# Altium PCB A1_v31.PcbDoc (part 6 of 6)
Units mil, origin at the board's own origin, x right, y up, seen from the top; angles counter-clockwise.
Board outline 3937.01 x 3149.61 mil, 2 copper layers (Top Layer, Bottom Layer); 94 components, 93 nets, 325 pads, 43 vias.
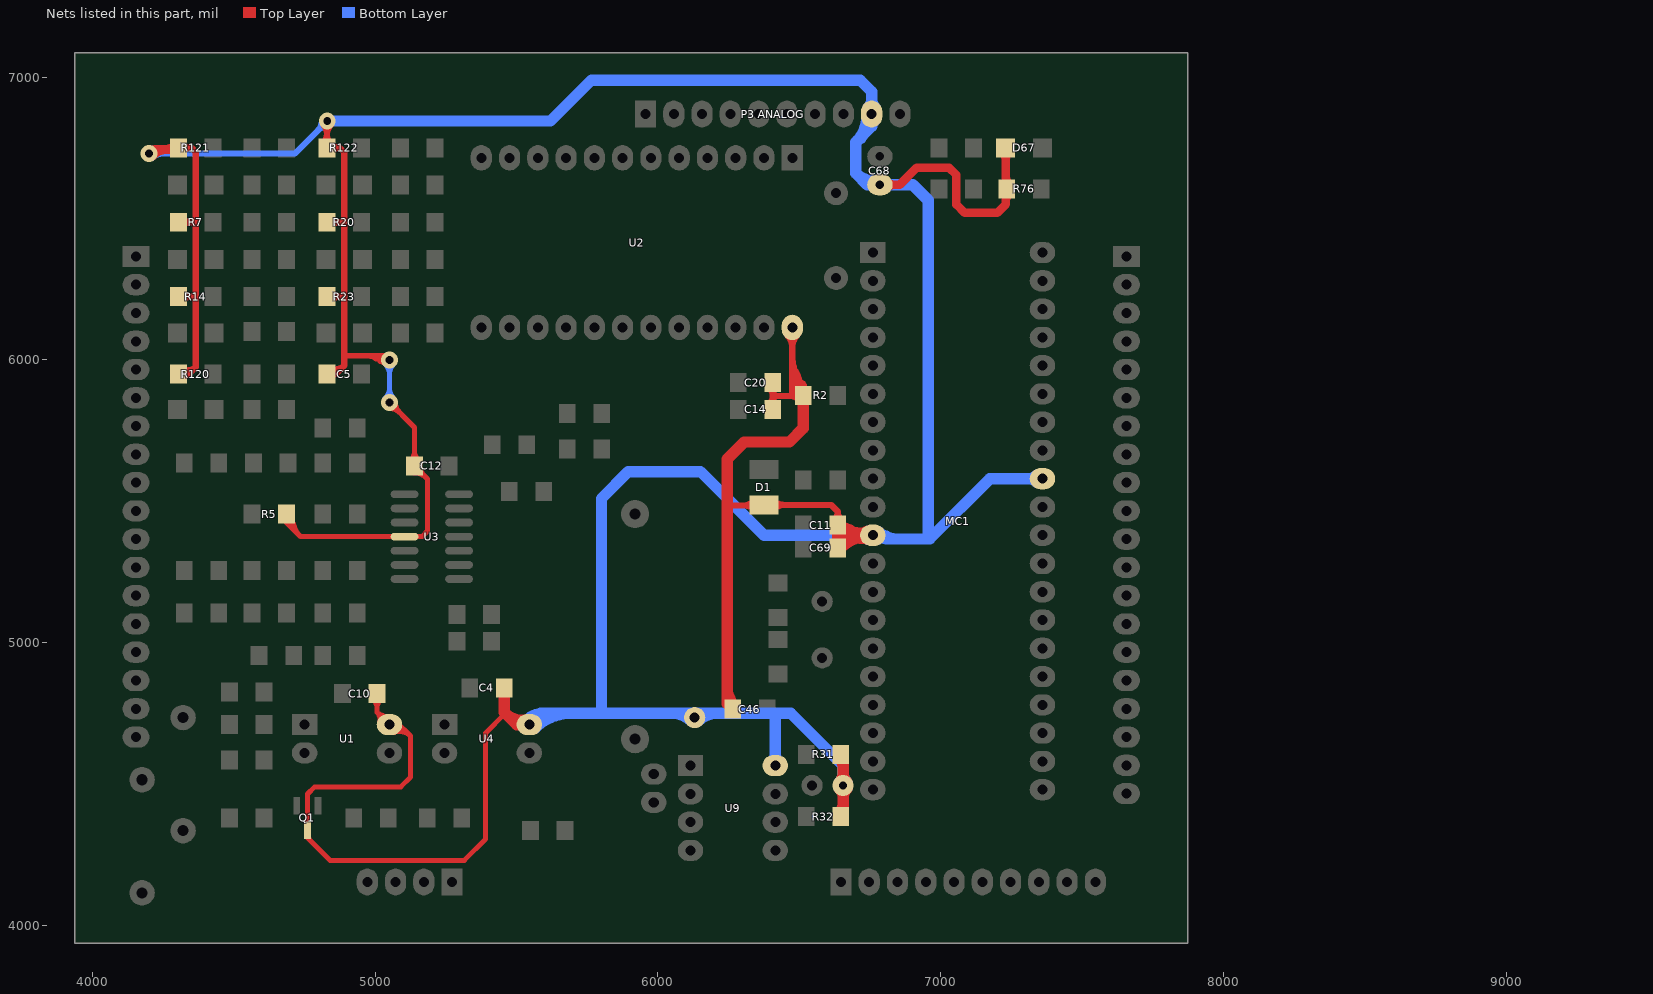
[diagram p6: the nets of this part, all layers, seen from the top]

## Via types
v1: diameter 60, hole 28, Top Layer to Bottom Layer, 30 vias
v2: diameter 90, hole 35.43, Top Layer to Bottom Layer, 6 vias
v3: diameter 75, hole 28, Top Layer to Bottom Layer, 5 vias
v4: diameter 75, hole 35.43, Top Layer to Bottom Layer, 2 vias

## Nets (pads, with @x,y where several pads share a name; then routed paths per layer and width w, separated by ;. In a path a pad name is that pad's centre, name@x,y a point inside that pad or via, vN(x,y) a via of type N, cw(c..) or ccw(c..) an arc to the next point about the centre after c; other vN are vias at no path point) (continued)
VCC: "P3 ANALOG.9" C4.2 C5.2 C10.2 C11.2 C12.2 C14.2 C20.2 C46.2 C68.1 C69.2 D1.1 D67.2 MC1.11 MC1.32 pad.0@6130,4735 Q1.3 R2.2 R5.1 R7.1 R14.1 R20.1 R23.1 R31.1 R32.1 R76.1 R120.2 R121.2 R122.2 U1.4 U2.24 U3.4 U4.4 U9.8 | length 36054.8
  Top Layer w18: R5.1@4686.02,5455 4686.02,5423.98 4735,5375 ; R5.1@4686.71,5430.55 cw(c4687.69,5400.93) 4709.83,5420.62 ; R5.1@4705.33,5444.08 ccw(c4727.27,5436.14) 4709.83,5420.63 ; 4890,6015 5035,6015 v1(5050,6000) ; C10.2@5006.02,4840 C10.2@5006.02,4820 5006.02,4753.98 U1.4@5050,4710 5085,4710 5125,4670 ; v1(5050,5850) 5138.98,5761.02 C12.2@5138.98,5625 5185,5578.98 5185,5395 5165,5375 U3.4@5103.54,5375 4735,5375 ; C4.2@5456.02,4840 5460,4836.02 5460,4750 5390,4680 5390,4305 5315,4230 4840,4230 4760,4310 Q1.3@4760,4336.69 4760,4464.57 4785.43,4490 5090,4490 5125,4525 5125,4670 ; R5.1@4680.13,5431.4 cw(c4673.48,5409.19) 4696.19,5413.87 ; R5.1@4680.13,5431.4 cw(c4673.48,5409.19) 4696.19,5413.87 ; R5.1@4680.13,5431.4 cw(c4673.48,5409.19) 4696.19,5413.87 ; R5.1@4684.63,5448.95 cw(c4644.07,5387.3) 4716.35,5402.21 ; R5.1@4684.63,5448.95 cw(c4644.07,5387.3) 4716.35,5402.21 ; R5.1@4684.63,5448.95 cw(c4644.07,5387.3) 4716.35,5402.21 ; R5.1@4688.55,5450.92 ccw(c4750.57,5447.29) 4706.64,5403.36 ; R5.1@4688.55,5450.92 ccw(c4750.57,5447.29) 4706.64,5403.36 ; R5.1@4688.55,5450.92 ccw(c4750.57,5447.29) 4706.64,5403.36 ; 4696.19,5413.87 cw(c4725.03,5419.82) R5.1@4702.05,5438.23 ; 4696.19,5413.87 cw(c4725.03,5419.82) R5.1@4702.05,5438.23 ; 4696.19,5413.87 cw(c4725.03,5419.82) R5.1@4702.05,5438.23 ; R5.1@4706.52,5449.87 ccw(c4804.16,5444.16) 4735,5375 ; R5.1@4706.52,5449.87 ccw(c4804.16,5444.16) 4735,5375 ; R5.1@4706.52,5449.87 ccw(c4804.16,5444.16) 4735,5375 ; Q1.3@4758.59,4314.57 cw(c4750.57,4300.67) 4766.08,4304.82 ; Q1.3@4758.59,4314.57 cw(c4750.57,4300.67) 4766.08,4304.82 ; Q1.3@4758.59,4314.57 cw(c4750.57,4300.67) 4766.08,4304.82 ; Q1.3@4762.81,4317.01 ccw(c4786.51,4317.01) 4769.75,4300.25 ; Q1.3@4762.81,4317.01 ccw(c4786.51,4317.01) 4769.75,4300.25 ; Q1.3@4762.81,4317.01 ccw(c4786.51,4317.01) 4769.75,4300.25 ; 4963.09,6015 cw(c4963.09,5913.09) v1@5035.15,5985.15 ; 4963.09,6015 cw(c4963.09,5913.09) v1@5035.15,5985.15 ; 4963.09,6015 cw(c4963.09,5913.09) v1@5035.15,5985.15 ; C10.2@4991.51,4801.55 cw(c4956.47,4766.51) 5006.02,4766.51 ; C10.2@4991.51,4801.55 cw(c4956.47,4766.51) 5006.02,4766.51 ; C10.2@4991.51,4801.55 cw(c4956.47,4766.51) 5006.02,4766.51 ; 4999.61,6005.67 ccw(c5012.51,6028.02) v1@5033.18,6012.57 ; 4999.61,6005.67 ccw(c5012.51,6028.02) v1@5033.18,6012.57 ; 4999.61,6005.67 ccw(c5012.51,6028.02) v1@5033.18,6012.57 ; 5006.02,4766.51 cw(c5055.58,4766.51) C10.2@5020.54,4801.55 ; 5006.02,4766.51 cw(c5055.58,4766.51) C10.2@5020.54,4801.55 ; 5006.02,4766.51 cw(c5055.58,4766.51) C10.2@5020.54,4801.55 ; 5006.03,4753.97 cw(c4980.38,4728.33) U1.4@5015.17,4718.07 ; 5006.03,4753.97 cw(c4980.38,4728.33) U1.4@5015.17,4718.07 ; 5006.03,4753.97 cw(c4980.38,4728.33) U1.4@5015.17,4718.07 ; 5006.54,6015 cw(c5006.54,5956.54) v1@5047.88,5997.88 ; 5006.54,6015 cw(c5006.54,5956.54) v1@5047.88,5997.88 ; 5006.54,6015 cw(c5006.54,5956.54) v1@5047.88,5997.88 ; 5006.65,4753.35 ccw(c5042.5,4789.2) U1.4@5042.5,4738.5 ; 5006.65,4753.35 ccw(c5042.5,4789.2) U1.4@5042.5,4738.5 ; 5006.65,4753.35 ccw(c5042.5,4789.2) U1.4@5042.5,4738.5 ; 5017.16,5995.54 ccw(c5028.86,6015.8) v1@5047.6,6001.8 ; 5017.16,5995.54 ccw(c5028.86,6015.8) v1@5047.6,6001.8 ; 5017.16,5995.54 ccw(c5028.86,6015.8) v1@5047.6,6001.8 ; 5021.55,4744.11 cw(c5011.56,4706.83) U1.4@5049.96,4710.76 ; 5021.55,4744.11 cw(c5011.56,4706.83) U1.4@5049.96,4710.76 ; 5021.55,4744.11 cw(c5011.56,4706.83) U1.4@5049.96,4710.76 ; v1@5049.4,5847.06 cw(c5041.55,5808.73) 5079.35,5818.85 ; v1@5049.4,5847.06 cw(c5041.55,5808.73) 5079.35,5818.85 ; v1@5049.4,5847.06 cw(c5041.55,5808.73) 5079.35,5818.85 ; v1@5050,5829 cw(c5050,5778.3) 5085.85,5814.15 ; v1@5050,5829 cw(c5050,5778.3) 5085.85,5814.15 ; v1@5050,5829 cw(c5050,5778.3) 5085.85,5814.15 ; v1@5052.94,5850.6 ccw(c5091.27,5858.45) 5081.15,5820.65 ; v1@5052.94,5850.6 ccw(c5091.27,5858.45) 5081.15,5820.65 ; v1@5052.94,5850.6 ccw(c5091.27,5858.45) 5081.15,5820.65 ; U1.4@5061,4700.1 cw(c5075.05,4660.41) 5104.82,4690.18 ; U1.4@5061,4700.1 cw(c5075.05,4660.41) 5104.82,4690.18 ; U1.4@5061,4700.1 cw(c5075.05,4660.41) 5104.82,4690.18 ; U1.4@5067.01,4683.13 cw(c5085.59,4630.6) 5125,4670 ; U1.4@5067.01,4683.13 cw(c5085.59,4630.6) 5125,4670 ; U1.4@5067.01,4683.13 cw(c5085.59,4630.6) 5125,4670 ; v1@5071,5850 ccw(c5121.7,5850) 5085.85,5814.15 ; v1@5071,5850 ccw(c5121.7,5850) 5085.85,5814.15 ; v1@5071,5850 ccw(c5121.7,5850) 5085.85,5814.15 ; C12.2@5124.46,5643.45 ccw(c5089.42,5678.49) 5138.98,5678.49 ; C12.2@5124.46,5643.45 ccw(c5089.42,5678.49) 5138.98,5678.49 ; C12.2@5124.46,5643.45 ccw(c5089.42,5678.49) 5138.98,5678.49 ; C12.2@5138.98,5600.54 cw(c5138.98,5541.47) 5180.74,5583.24 ; C12.2@5138.98,5600.54 cw(c5138.98,5541.47) 5180.74,5583.24 ; C12.2@5138.98,5600.54 cw(c5138.98,5541.47) 5180.74,5583.24 ; 5138.98,5678.49 ccw(c5188.53,5678.49) C12.2@5153.49,5643.45 ; 5138.98,5678.49 ccw(c5188.53,5678.49) C12.2@5153.49,5643.45 ; 5138.98,5678.49 ccw(c5188.53,5678.49) C12.2@5153.49,5643.45 ; C12.2@5141.41,5621.73 ccw(c5182.42,5632.89) 5171.42,5591.84 ; C12.2@5141.41,5621.73 ccw(c5182.42,5632.89) 5171.42,5591.84 ; C12.2@5141.41,5621.73 ccw(c5182.42,5632.89) 5171.42,5591.84 ; C12.2@5159.5,5621.06 ccw(c5199.56,5621.06) 5171.23,5592.74 ; C12.2@5159.5,5621.06 ccw(c5199.56,5621.06) 5171.23,5592.74 ; C12.2@5159.5,5621.06 ccw(c5199.56,5621.06) 5171.23,5592.74 ; C4.2@5441.51,4821.55 cw(c5396.87,4776.91) 5460,4776.91 ; C4.2@5441.51,4821.55 cw(c5396.87,4776.91) 5460,4776.91 ; C4.2@5441.51,4821.55 cw(c5396.87,4776.91) 5460,4776.91 ; 5460,4796.1 cw(c5495.98,4796.1) C4.2@5470.54,4821.55 ; 5460,4796.1 cw(c5495.98,4796.1) C4.2@5470.54,4821.55 ; 5460,4796.1 cw(c5495.98,4796.1) C4.2@5470.54,4821.55
  Top Layer w22: v1(4200,6730) 4220,6750 R121.2@4303.98,6750 4350,6750 4365,6735 4365,6485 ; R120.2@4303.98,5950 4340,5950 ; R14.1@4303.98,6224.43 4360.57,6224.43 4365,6220 ; R7.1@4303.98,6487.21 4362.79,6487.21 4365,6485 ; C5.2@4828.98,5950 4860,5950 ; R23.1@4828.98,6224.43 4885.57,6224.43 4890,6220 ; R20.1@4828.98,6487.21 4887.79,6487.21 4890,6485 ; v1(4830,6845) 4828.98,6843.98 R122.2@4828.98,6750 4875,6750 4890,6735 4890,6485 ; 6245,5485 6372.99,5485 D1.1@6375,5487.01 6612.99,5487.01 6636.02,5463.98 C11.2@6636.02,5416 ; C14.2@6406.02,5825 6406.02,5872.5 ; C20.2@6406.02,5920 6406.02,5872.5 ; U2.24@6475,6115 6475,5875 ; 6484.64,5916.54 cw(c6471.38,5893.58) R2.2@6496.45,5884.96 ; 6497.26,5914.34 ccw(c6549.95,5912.57) R2.2@6511.44,5876.57 ; C68.1@6815,6620 6820,6615 6835,6615 ; D67.2@7230.04,6750 7233.98,6746.06 R76.1@7233.98,6605 ; v1@4197.88,6732.12 cw(c4241.04,6688.96) 4241.04,6750 ; v1@4197.88,6732.12 cw(c4241.04,6688.96) 4241.04,6750 ; v1@4197.88,6732.12 cw(c4241.04,6688.96) 4241.04,6750 ; v1@4207.34,6747.53 ccw(c4215.77,6767.66) 4226.69,6748.76 ; v1@4207.34,6747.53 ccw(c4215.77,6767.66) 4226.69,6748.76 ; v1@4207.34,6747.53 ccw(c4215.77,6767.66) 4226.69,6748.76 ; v1@4212.2,6744.57 ccw(c4236.5,6773.6) 4255.43,6740.81 ; v1@4212.2,6744.57 ccw(c4236.5,6773.6) 4255.43,6740.81 ; v1@4212.2,6744.57 ccw(c4236.5,6773.6) 4255.43,6740.81 ; v1@4213.44,6716.56 cw(c4294.15,6635.85) R121.2@4294.15,6750 ; v1@4213.44,6716.56 cw(c4294.15,6635.85) R121.2@4294.15,6750 ; v1@4213.44,6716.56 cw(c4294.15,6635.85) R121.2@4294.15,6750 ; v1@4218.82,6732.63 cw(c4234.72,6734.85) 4226.69,6748.76 ; v1@4218.82,6732.63 cw(c4234.72,6734.85) 4226.69,6748.76 ; v1@4218.82,6732.63 cw(c4234.72,6734.85) 4226.69,6748.76 ; 4247.7,6737.55 cw(c4262.77,6681.31) R121.2@4294.03,6730.43 ; 4247.7,6737.55 cw(c4262.77,6681.31) R121.2@4294.03,6730.43 ; 4247.7,6737.55 cw(c4262.77,6681.31) R121.2@4294.03,6730.43 ; 4259.25,6750 cw(c4259.25,6705.27) R121.2@4290.88,6736.9 ; 4259.25,6750 ccw(c4259.25,6794.73) R121.2@4290.88,6763.1 ; 4259.25,6750 ccw(c4259.25,6794.73) R121.2@4290.88,6763.1 ; 4259.25,6750 cw(c4259.25,6705.27) R121.2@4290.88,6736.9 ; 4259.25,6750 ccw(c4259.25,6794.73) R121.2@4290.88,6763.1 ; 4259.25,6750 cw(c4259.25,6705.27) R121.2@4290.88,6736.9 ; 4273.92,6744.58 ccw(c4267.95,6766.86) R121.2@4287.93,6755.33 ; 4273.92,6744.58 ccw(c4267.95,6766.86) R121.2@4287.93,6755.33 ; 4273.92,6744.58 ccw(c4267.95,6766.86) R121.2@4287.93,6755.33 ; R120.2@4302.1,5951.02 ccw(c4320.99,5980.4) 4345.7,5955.7 ; R120.2@4302.1,5951.02 ccw(c4320.99,5980.4) 4345.7,5955.7 ; R120.2@4302.1,5951.02 ccw(c4320.99,5980.4) 4345.7,5955.7 ; R120.2@4314,5969.52 ccw(c4336.1,6003.9) 4365,5975 ; R120.2@4314,5969.52 ccw(c4336.1,6003.9) 4365,5975 ; R120.2@4314,5969.52 ccw(c4336.1,6003.9) 4365,5975 ; R14.1@4317.08,6211.33 cw(c4348.71,6179.7) 4348.71,6224.43 ; R14.1@4317.08,6211.33 cw(c4348.71,6179.7) 4348.71,6224.43 ; R14.1@4317.08,6211.33 cw(c4348.71,6179.7) 4348.71,6224.43 ; R14.1@4317.08,6237.53 ccw(c4348.71,6269.16) 4348.71,6224.43 ; R14.1@4317.08,6237.53 ccw(c4348.71,6269.16) 4348.71,6224.43 ; R14.1@4317.08,6237.53 ccw(c4348.71,6269.16) 4348.71,6224.43 ; R7.1@4317.08,6474.11 cw(c4348.71,6442.48) 4348.71,6487.21 ; R7.1@4317.08,6474.11 cw(c4348.71,6442.48) 4348.71,6487.21 ; R7.1@4317.08,6474.11 cw(c4348.71,6442.48) 4348.71,6487.21 ; R7.1@4317.08,6500.31 ccw(c4348.71,6531.94) 4348.71,6487.21 ; R7.1@4317.08,6500.31 ccw(c4348.71,6531.94) 4348.71,6487.21 ; R7.1@4317.08,6500.31 ccw(c4348.71,6531.94) 4348.71,6487.21 ; R121.2@4317.08,6736.9 cw(c4348.71,6705.27) 4348.71,6750 ; R121.2@4317.08,6736.9 cw(c4348.71,6705.27) 4348.71,6750 ; R121.2@4317.08,6736.9 cw(c4348.71,6705.27) 4348.71,6750 ; R121.2@4317.08,6763.1 ccw(c4348.71,6794.73) 4348.71,6750 ; R121.2@4317.08,6763.1 ccw(c4348.71,6794.73) 4348.71,6750 ; R121.2@4317.08,6763.1 ccw(c4348.71,6794.73) 4348.71,6750 ; R120.2@4319.05,5939.22 cw(c4340,5924.25) 4340,5950 ; R120.2@4319.05,5939.22 cw(c4340,5924.25) 4340,5950 ; R120.2@4319.05,5939.22 cw(c4340,5924.25) 4340,5950 ; R120.2@4319.05,5960.78 ccw(c4340,5975.75) 4340,5950 ; R120.2@4319.05,5960.78 ccw(c4340,5975.75) 4340,5950 ; R120.2@4319.05,5960.78 ccw(c4340,5975.75) 4340,5950 ; 4340,5950 4365,5975 ; 4365,5975 4365,6220 ; 4365,6220 4365,6485 ; R122.2@4815.88,6767.04 ccw(c4784.25,6798.67) 4828.98,6798.67 ; R122.2@4815.88,6767.04 ccw(c4784.25,6798.67) 4828.98,6798.67 ; R122.2@4815.88,6767.04 ccw(c4784.25,6798.67) 4828.98,6798.67 ; v1@4816.56,6831.56 cw(c4786.6,6801.6) 4828.98,6801.6 ; v1@4816.56,6831.56 cw(c4786.6,6801.6) 4828.98,6801.6 ; v1@4816.56,6831.56 cw(c4786.6,6801.6) 4828.98,6801.6 ; C5.2@4827.5,5950.79 ccw(c4842.65,5983.05) 4867.85,5957.85 ; C5.2@4827.5,5950.79 ccw(c4842.65,5983.05) 4867.85,5957.85 ; C5.2@4827.5,5950.79 ccw(c4842.65,5983.05) 4867.85,5957.85 ; 4828.98,6796.66 cw(c4878.34,6796.66) v1@4843.44,6831.56 ; 4828.98,6796.66 cw(c4878.34,6796.66) v1@4843.44,6831.56 ; 4828.98,6796.66 cw(c4878.34,6796.66) v1@4843.44,6831.56 ; 4828.98,6798.67 ccw(c4873.71,6798.67) R122.2@4842.08,6767.04 ; 4828.98,6798.67 ccw(c4873.71,6798.67) R122.2@4842.08,6767.04 ; 4828.98,6798.67 ccw(c4873.71,6798.67) R122.2@4842.08,6767.04 ; C5.2@4836.85,5970.71 ccw(c4856.81,6013.19) 4890,5980 ; C5.2@4836.85,5970.71 ccw(c4856.81,6013.19) 4890,5980 ; C5.2@4836.85,5970.71 ccw(c4856.81,6013.19) 4890,5980 ; R23.1@4842.08,6211.33 cw(c4873.71,6179.7) 4873.71,6224.43 ; R23.1@4842.08,6211.33 cw(c4873.71,6179.7) 4873.71,6224.43 ; R23.1@4842.08,6211.33 cw(c4873.71,6179.7) 4873.71,6224.43 ; R23.1@4842.08,6237.53 ccw(c4873.71,6269.16) 4873.71,6224.43 ; R23.1@4842.08,6237.53 ccw(c4873.71,6269.16) 4873.71,6224.43 ; R23.1@4842.08,6237.53 ccw(c4873.71,6269.16) 4873.71,6224.43 ; R20.1@4842.08,6474.11 cw(c4873.71,6442.48) 4873.71,6487.21 ; R20.1@4842.08,6474.11 cw(c4873.71,6442.48) 4873.71,6487.21 ; R20.1@4842.08,6474.11 cw(c4873.71,6442.48) 4873.71,6487.21 ; R20.1@4842.08,6500.31 ccw(c4873.71,6531.94) 4873.71,6487.21 ; R20.1@4842.08,6500.31 ccw(c4873.71,6531.94) 4873.71,6487.21 ; R20.1@4842.08,6500.31 ccw(c4873.71,6531.94) 4873.71,6487.21 ; R122.2@4842.08,6736.9 cw(c4873.71,6705.27) 4873.71,6750 ; R122.2@4842.08,6736.9 cw(c4873.71,6705.27) 4873.71,6750 ; R122.2@4842.08,6736.9 cw(c4873.71,6705.27) 4873.71,6750 ; R122.2@4842.08,6763.1 ccw(c4873.71,6794.73) 4873.71,6750 ; R122.2@4842.08,6763.1 ccw(c4873.71,6794.73) 4873.71,6750 ; R122.2@4842.08,6763.1 ccw(c4873.71,6794.73) 4873.71,6750 ; C5.2@4845.29,5941.21 cw(c4860,5933.29) 4860,5950 ; C5.2@4845.29,5941.21 cw(c4860,5933.29) 4860,5950 ; C5.2@4845.29,5941.21 cw(c4860,5933.29) 4860,5950 ; C5.2@4845.29,5958.79 ccw(c4860,5966.71) 4860,5950 ; C5.2@4845.29,5958.79 ccw(c4860,5966.71) 4860,5950 ; C5.2@4845.29,5958.79 ccw(c4860,5966.71) 4860,5950 ; 4860,5950 4890,5980 ; 4890,5980 4890,6015 4890,6220 ; 4890,6220 4890,6485 ; 6298.2,5485 ccw(c6298.2,5546.09) D1.1@6341.4,5502.89 ; 6298.2,5485 ccw(c6298.2,5546.09) D1.1@6341.4,5502.89 ; 6298.2,5485 ccw(c6298.2,5546.09) D1.1@6341.4,5502.89 ; 6307.9,5485 cw(c6307.9,5437.62) D1.1@6341.4,5471.12 ; 6307.9,5485 cw(c6307.9,5437.62) D1.1@6341.4,5471.12 ; 6307.9,5485 cw(c6307.9,5437.62) D1.1@6341.4,5471.12 ; C14.2@6393.17,5842.28 ccw(c6364.08,5872.5) 6406.02,5872.5 ; C14.2@6393.17,5842.28 ccw(c6364.08,5872.5) 6406.02,5872.5 ; C14.2@6393.17,5842.28 ccw(c6364.08,5872.5) 6406.02,5872.5 ; C20.2@6393.17,5902.72 cw(c6364.08,5872.5) 6406.02,5872.5 ; C20.2@6393.17,5902.72 cw(c6364.08,5872.5) 6406.02,5872.5 ; C20.2@6393.17,5902.72 cw(c6364.08,5872.5) 6406.02,5872.5 ; 6406.02,5872.5 cw(c6447.97,5872.5) C20.2@6418.87,5902.72 ; 6406.02,5872.5 ccw(c6447.97,5872.5) C14.2@6418.87,5842.28 ; 6406.02,5872.5 cw(c6447.97,5872.5) C20.2@6418.87,5902.72 ; 6406.02,5872.5 ccw(c6447.97,5872.5) C14.2@6418.87,5842.28 ; 6406.02,5872.5 cw(c6447.97,5872.5) C20.2@6418.87,5902.72 ; 6406.02,5872.5 ccw(c6447.97,5872.5) C14.2@6418.87,5842.28 ; 6406.02,5872.5 6511.48,5872.5 R2.2@6513.98,5875 6475,5875 ; D1.1@6408.6,5471.12 cw(c6446.95,5432.77) 6446.95,5487.01 ; D1.1@6408.6,5471.12 cw(c6446.95,5432.77) 6446.95,5487.01 ; D1.1@6408.6,5471.12 cw(c6446.95,5432.77) 6446.95,5487.01 ; D1.1@6408.6,5502.89 ccw(c6446.95,5541.24) 6446.95,5487.01 ; D1.1@6408.6,5502.89 ccw(c6446.95,5541.24) 6446.95,5487.01 ; D1.1@6408.6,5502.89 ccw(c6446.95,5541.24) 6446.95,5487.01 ; U2.24@6456.26,6088.76 cw(c6411.02,6043.52) 6475,6043.52 ; U2.24@6456.26,6088.76 cw(c6411.02,6043.52) 6475,6043.52 ; U2.24@6456.26,6088.76 cw(c6411.02,6043.52) 6475,6043.52 ; 6465.78,5872.5 cw(c6465.78,5822.86) R2.2@6500.88,5857.96 ; 6465.78,5872.5 cw(c6465.78,5822.86) R2.2@6500.88,5857.96 ; 6465.78,5872.5 cw(c6465.78,5822.86) R2.2@6500.88,5857.96 ; 6472.72,5872.5 ccw(c6472.72,5912.32) R2.2@6500.88,5884.16 ; 6472.72,5872.5 ccw(c6472.72,5912.32) R2.2@6500.88,5884.16 ; 6472.72,5872.5 ccw(c6472.72,5912.32) R2.2@6500.88,5884.16 ; 6475,5875 cw(c6475,5843.27) R2.2@6499.61,5863.3 ; 6475,5875 ccw(c6475,5906.73) R2.2@6499.61,5886.7 ; 6475,5875 ccw(c6475,5906.73) R2.2@6499.61,5886.7 ; 6475,5875 cw(c6475,5843.27) R2.2@6499.61,5863.3 ; 6475,5875 ccw(c6475,5906.73) R2.2@6499.61,5886.7 ; 6475,5875 cw(c6475,5843.27) R2.2@6499.61,5863.3 ; 6475,5911.54 ccw(c6546.58,5911.54) R2.2@6495.96,5860.93 ; 6475,5911.54 ccw(c6546.58,5911.54) R2.2@6495.96,5860.93 ; 6475,5911.54 ccw(c6546.58,5911.54) R2.2@6495.96,5860.93 ; 6475,5964.65 ccw(c6599.69,5964.65) R2.2@6511.52,5876.48 ; 6475,5964.65 ccw(c6599.69,5964.65) R2.2@6511.52,5876.48 ; 6475,5964.65 ccw(c6599.69,5964.65) R2.2@6511.52,5876.48 ; 6475,6017.76 ccw(c6652.8,6017.76) R2.2@6527.08,5892.04 ; 6475,6017.76 ccw(c6652.8,6017.76) R2.2@6527.08,5892.04 ; 6475,6017.76 ccw(c6652.8,6017.76) R2.2@6527.08,5892.04 ; 6475,6043.52 cw(c6538.98,6043.52) U2.24@6493.74,6088.76 ; 6475,6043.52 cw(c6538.98,6043.52) U2.24@6493.74,6088.76 ; 6475,6043.52 cw(c6538.98,6043.52) U2.24@6493.74,6088.76 ; 6481.73,5885.58 ccw(c6503.7,5898.27) R2.2@6515.61,5875.87 ; 6481.73,5885.58 ccw(c6503.7,5898.27) R2.2@6515.61,5875.87 ; 6481.73,5885.58 ccw(c6503.7,5898.27) R2.2@6515.61,5875.87 ; 6484.66,5923.01 ccw(c6533.31,5951.1) R2.2@6518.77,5896.83 ; 6484.66,5923.01 ccw(c6533.31,5951.1) R2.2@6518.77,5896.83 ; 6484.66,5923.01 ccw(c6533.31,5951.1) R2.2@6518.77,5896.83 ; 6487.21,5959.22 cw(c6406.85,5911.53) R2.2@6496.25,5884.33 ; 6487.21,5959.22 cw(c6406.85,5911.53) R2.2@6496.25,5884.33 ; 6487.21,5959.22 cw(c6406.85,5911.53) R2.2@6496.25,5884.33 ; 6492.76,5908.98 cw(c6463.94,5892.35) R2.2@6496.08,5883.73 ; 6492.76,5908.98 cw(c6463.94,5892.35) R2.2@6496.08,5883.73 ; 6492.76,5908.98 cw(c6463.94,5892.35) R2.2@6496.08,5883.73 ; 6512.66,5916.33 cw(c6471.45,5891.87) R2.2@6517.3,5877.93 ; 6512.66,5916.33 cw(c6471.45,5891.87) R2.2@6517.3,5877.93 ; 6512.66,5916.33 cw(c6471.45,5891.87) R2.2@6517.3,5877.93 ; C11.2@6623.07,5433.18 ccw(c6592.95,5463.97) 6636.02,5463.97 ; C11.2@6623.07,5433.18 ccw(c6592.95,5463.97) 6636.02,5463.97 ; C11.2@6623.07,5433.18 ccw(c6592.95,5463.97) 6636.02,5463.97 ; 6636.02,5463.97 ccw(c6679.09,5463.97) C11.2@6648.98,5433.18 ; 6636.02,5463.97 ccw(c6679.09,5463.97) C11.2@6648.98,5433.18 ; 6636.02,5463.97 ccw(c6679.09,5463.97) C11.2@6648.98,5433.18 ; C68.1@6804.23,6601.77 cw(c6835,6572.62) 6835,6615 ; C68.1@6804.23,6601.77 cw(c6835,6572.62) 6835,6615 ; C68.1@6804.23,6601.77 cw(c6835,6572.62) 6835,6615 ; C68.1@6808.9,6631.44 ccw(c6835,6643.93) 6835,6615 ; C68.1@6808.9,6631.44 ccw(c6835,6643.93) 6835,6615 ; C68.1@6808.9,6631.44 ccw(c6835,6643.93) 6835,6615 ; D67.2@7214.16,6734.12 cw(c7166.3,6686.26) 7233.98,6686.26 ; D67.2@7214.16,6734.12 cw(c7166.3,6686.26) 7233.98,6686.26 ; D67.2@7214.16,6734.12 cw(c7166.3,6686.26) 7233.98,6686.26 ; R76.1@7220.88,6622.04 ccw(c7189.25,6653.67) 7233.98,6653.67 ; R76.1@7220.88,6622.04 ccw(c7189.25,6653.67) 7233.98,6653.67 ; R76.1@7220.88,6622.04 ccw(c7189.25,6653.67) 7233.98,6653.67 ; 7233.98,6653.67 ccw(c7278.71,6653.67) R76.1@7247.08,6622.04 ; 7233.98,6653.67 ccw(c7278.71,6653.67) R76.1@7247.08,6622.04 ; 7233.98,6653.67 ccw(c7278.71,6653.67) R76.1@7247.08,6622.04 ; 7233.98,6705.27 cw(c7274.77,6705.27) D67.2@7245.92,6734.12 ; 7233.98,6705.27 cw(c7274.77,6705.27) D67.2@7245.92,6734.12 ; 7233.98,6705.27 cw(c7274.77,6705.27) D67.2@7245.92,6734.12
  Top Layer w30: C68.1@6815,6620 6855,6620 6915,6680 7030,6680 7055.5,6654.5 7055.5,6549.5 7085,6520 7200,6520 7230.04,6550.04 D67.2@7230.04,6750 ; C68.1@6800.91,6604.09 cw(c6839.32,6565.68) 6839.32,6620 ; C68.1@6800.91,6604.09 cw(c6839.32,6565.68) 6839.32,6620 ; C68.1@6800.91,6604.09 cw(c6839.32,6565.68) 6839.32,6620 ; C68.1@6800.91,6635.91 ccw(c6839.32,6674.32) 6839.32,6620 ; C68.1@6800.91,6635.91 ccw(c6839.32,6674.32) 6839.32,6620 ; C68.1@6800.91,6635.91 ccw(c6839.32,6674.32) 6839.32,6620 ; D67.2@7216.98,6736.94 cw(c7185.46,6705.42) 7230.04,6705.42 ; D67.2@7216.98,6736.94 cw(c7185.46,6705.42) 7230.04,6705.42 ; D67.2@7216.98,6736.94 cw(c7185.46,6705.42) 7230.04,6705.42 ; 7230.04,6556.49 cw(c7278.55,6556.49) R76.1@7244.25,6590.79 ; 7230.04,6556.49 cw(c7278.55,6556.49) R76.1@7244.25,6590.79 ; 7230.04,6556.49 cw(c7278.55,6556.49) R76.1@7244.25,6590.79 ; 7230.04,6653.51 ccw(c7278.55,6653.51) R76.1@7244.25,6619.21 ; 7230.04,6653.51 ccw(c7278.55,6653.51) R76.1@7244.25,6619.21 ; 7230.04,6653.51 ccw(c7278.55,6653.51) R76.1@7244.25,6619.21 ; 7230.04,6705.42 cw(c7274.62,6705.42) D67.2@7243.1,6736.94 ; 7230.04,6705.42 cw(c7274.62,6705.42) D67.2@7243.1,6736.94 ; 7230.04,6705.42 cw(c7274.62,6705.42) D67.2@7243.1,6736.94
  Top Layer w40: C4.2@5456.02,4840 5456.02,4753.98 5460,4750 ; U4.4@5534.21,4727.19 cw(c5518.63,4808.63) 5460,4750 ; U4.4@5545,4710 5500,4710 5460,4750 ; C46.2@6245,4783.98 6245,5485 6245,5650 6305,5710 6465,5710 6513.98,5758.98 R2.2@6513.98,5875 ; C69.2@6636.02,5335 C11.2@6636.02,5416 6672.02,5380 MC1.11@6760,5380 ; R32.1@6639.29,4395.67 ccw(c6601.35,4433.61) 6655,4433.61 ; R31.1@6639.29,4594.33 cw(c6601.35,4556.39) 6655,4556.39 ; v3@6642.63,4482.63 cw(c6612.75,4452.75) 6655,4452.75 cw(c6697.25,4452.75) v3@6667.37,4482.63 ; v3@6642.63,4507.37 ccw(c6612.75,4537.25) 6655,4537.25 ccw(c6697.25,4537.25) v3@6667.37,4507.37 ; C11.2@6644.5,5416.41 ccw(c6666.66,5427.75) 6666.66,5402.86 ; R32.1@6655,4391.02 v3(6655,4495) R31.1@6655,4610 ; 6245,4837.75 ccw(c6332.79,4837.75) C46.2@6270.71,4775.67 ; 6245,4837.75 ccw(c6332.79,4837.75) C46.2@6270.71,4775.67 ; 6245,4837.75 ccw(c6332.79,4837.75) C46.2@6270.71,4775.67 ; 6250.65,4810.43 cw(c6208.85,4786.29) C46.2@6254.89,4771.8 ; 6250.65,4810.43 cw(c6208.85,4786.29) C46.2@6254.89,4771.8 ; 6250.65,4810.43 cw(c6208.85,4786.29) C46.2@6254.89,4771.8 ; C11.2@6636.02,5402.54 cw(c6636.02,5370.03) C11.2@6659.01,5393.01 ; C11.2@6636.02,5402.54 cw(c6636.02,5370.03) C11.2@6659.01,5393.01 ; C11.2@6636.02,5402.54 cw(c6636.02,5370.03) C11.2@6659.01,5393.01 ; C11.2@6638.49,5402.86 cw(c6652.58,5350.29) 6679.79,5397.42 ; C11.2@6638.49,5402.86 cw(c6652.58,5350.29) 6679.79,5397.42 ; C11.2@6638.49,5402.86 cw(c6652.58,5350.29) 6679.79,5397.42 ; C69.2@6642.76,5332.2 cw(c6758.16,5216.8) MC1.11@6758.16,5380 ; C69.2@6642.76,5332.2 cw(c6758.16,5216.8) MC1.11@6758.16,5380 ; C69.2@6642.76,5332.2 cw(c6758.16,5216.8) MC1.11@6758.16,5380 ; C11.2@6642.76,5418.8 ccw(c6736.43,5512.47) MC1.11@6736.43,5380 ; C11.2@6642.76,5418.8 ccw(c6736.43,5512.47) MC1.11@6736.43,5380 ; C11.2@6642.76,5418.8 ccw(c6736.43,5512.47) MC1.11@6736.43,5380 ; 6700.92,5389.52 ccw(c6715.53,5444.04) MC1.11@6743.75,5395.16 ; 6700.92,5389.52 ccw(c6715.53,5444.04) MC1.11@6743.75,5395.16 ; 6700.92,5389.52 ccw(c6715.53,5444.04) MC1.11@6743.75,5395.16 ; 6710.25,5380 cw(c6710.25,5337.75) MC1.11@6740.13,5367.63 ; 6710.25,5380 ccw(c6710.25,5422.25) MC1.11@6740.13,5392.37 ; 6710.25,5380 ccw(c6710.25,5422.25) MC1.11@6740.13,5392.37 ; 6710.25,5380 cw(c6710.25,5337.75) MC1.11@6740.13,5367.63 ; 6710.25,5380 ccw(c6710.25,5422.25) MC1.11@6740.13,5392.37 ; 6710.25,5380 cw(c6710.25,5337.75) MC1.11@6740.13,5367.63 ; 6715.49,5368.57 cw(c6725.13,5332.59) MC1.11@6743.75,5364.84 ; 6715.49,5368.57 cw(c6725.13,5332.59) MC1.11@6743.75,5364.84 ; 6715.49,5368.57 cw(c6725.13,5332.59) MC1.11@6743.75,5364.84
  Bottom Layer w18: v1(5050,5850) v1(5050,6000) ; v1@5035.15,5864.85 ccw(c4999.3,5900.7) 5050,5900.7 ; v1@5035.15,5864.85 ccw(c4999.3,5900.7) 5050,5900.7 ; v1@5035.15,5864.85 ccw(c4999.3,5900.7) 5050,5900.7 ; v1@5035.15,5985.15 cw(c4999.3,5949.3) 5050,5949.3 ; v1@5035.15,5985.15 cw(c4999.3,5949.3) 5050,5949.3 ; v1@5035.15,5985.15 cw(c4999.3,5949.3) 5050,5949.3 ; 5050,5900.7 ccw(c5100.7,5900.7) v1@5064.85,5864.85 ; 5050,5900.7 ccw(c5100.7,5900.7) v1@5064.85,5864.85 ; 5050,5900.7 ccw(c5100.7,5900.7) v1@5064.85,5864.85 ; 5050,5949.3 cw(c5100.7,5949.3) v1@5064.85,5985.15 ; 5050,5949.3 cw(c5100.7,5949.3) v1@5064.85,5985.15 ; 5050,5949.3 cw(c5100.7,5949.3) v1@5064.85,5985.15
  Bottom Layer w22: v1(4200,6730) 4715,6730 v1(4830,6845) ; v1@4213.44,6716.56 cw(c4245.87,6684.13) 4245.87,6730 ; v1@4213.44,6716.56 cw(c4245.87,6684.13) 4245.87,6730 ; v1@4213.44,6716.56 cw(c4245.87,6684.13) 4245.87,6730 ; v1@4213.44,6743.44 ccw(c4245.87,6775.87) 4245.87,6730 ; v1@4213.44,6743.44 ccw(c4245.87,6775.87) 4245.87,6730 ; v1@4213.44,6743.44 ccw(c4245.87,6775.87) 4245.87,6730 ; 4797.56,6812.56 cw(c4830,6780.13) v1@4830,6826 ; 4797.56,6812.56 ccw(c4765.13,6845) v1@4811,6845 ; 4797.56,6812.56 ccw(c4765.13,6845) v1@4811,6845 ; 4797.56,6812.56 cw(c4830,6780.13) v1@4830,6826 ; 4797.56,6812.56 ccw(c4765.13,6845) v1@4811,6845 ; 4797.56,6812.56 cw(c4830,6780.13) v1@4830,6826
  Bottom Layer w40: v1(4830,6845) 5620,6845 5765,6990 6715,6990 6755.91,6949.09 6755.91,6870.08 6755.91,6825.91 6700,6770 6700,6660 ; U4.4@5536.59,4725.91 cw(c5594.75,4667.75) 5594.75,4750 ; U4.4@5545,4710 5585,4750 ; U4.4@5564.87,4697.63 cw(c5691.32,4571.18) 5691.32,4750 ; U4.4@5569.98,4710.9 cw(c5621.43,4713.57) 5585,4750 ; 6051.54,4750 cw(c6051.54,4656.54) pad.0@6117.63,4722.63 ; pad.0@6142.37,4722.63 cw(c6208.46,4656.54) 6208.46,4750 ; U9.8@6402.63,4577.37 ccw(c6372.75,4607.25) 6415,4607.25 ccw(c6457.25,4607.25) U9.8@6427.37,4577.37 ; U9.8@6415,4565 6415,4740 6405,4750 ; v3@6642.63,4507.37 ccw(c6612.75,4537.25) 6655,4537.25 ccw(c6697.25,4537.25) v3@6667.37,4507.37 ; v3(6655,4495) 6655,4565 6470,4750 6405,4750 ; 6728.07,6808.34 ccw(c6695.74,6840.66) 6739.25,6854.7 ; 6956,5387 6956,6565 6901,6620 C68.1@6785,6620 6740,6620 6700,6660 ; MC1.32@7360,5580 7174,5580 6961,5367 6811,5367 ; 5585,4750 5805,4750 ; 5805,4750 5800,4755 5800,5510 5895,5605 6150,5605 6375,5380 MC1.11@6760,5380 6798,5380 6811,5367 ; 5805,4750 6405,4750 ; 6700,6660 ccw(c6761.07,6721.06) C68.1@6780.97,6637.03 ; 6700,6660 ccw(c6761.07,6721.06) C68.1@6780.97,6637.03 ; 6700,6660 ccw(c6761.07,6721.06) C68.1@6780.97,6637.03 ; 6701.87,6771.87 ccw(c6613.66,6860.08) 6738.41,6860.08 ; 6701.87,6771.87 ccw(c6613.66,6860.08) 6738.41,6860.08 ; 6701.87,6771.87 ccw(c6613.66,6860.08) 6738.41,6860.08 ; 6710.25,5380 cw(c6710.25,5337.75) MC1.11@6740.13,5367.63 ; 6710.25,5380 ccw(c6710.25,5422.25) MC1.11@6740.13,5392.37 ; 6710.25,5380 ccw(c6710.25,5422.25) MC1.11@6740.13,5392.37 ; 6710.25,5380 cw(c6710.25,5337.75) MC1.11@6740.13,5367.63 ; 6710.25,5380 ccw(c6710.25,5422.25) MC1.11@6740.13,5392.37 ; 6710.25,5380 cw(c6710.25,5337.75) MC1.11@6740.13,5367.63 ; 6718.08,6784.23 cw(c6814.64,6758.35) 6764.66,6844.92 ; 6718.08,6784.23 cw(c6814.64,6758.35) 6764.66,6844.92 ; 6718.08,6784.23 cw(c6814.64,6758.35) 6764.66,6844.92 ; C68.1@6742.75,6620 cw(c6742.75,6577.75) C68.1@6772.63,6607.63 ; C68.1@6742.75,6620 ccw(c6742.75,6662.25) C68.1@6772.63,6632.37 ; C68.1@6742.75,6620 ccw(c6742.75,6662.25) C68.1@6772.63,6632.37 ; C68.1@6742.75,6620 cw(c6742.75,6577.75) C68.1@6772.63,6607.63 ; C68.1@6742.75,6620 ccw(c6742.75,6662.25) C68.1@6772.63,6632.37 ; C68.1@6742.75,6620 cw(c6742.75,6577.75) C68.1@6772.63,6607.63 ; 6743.53,6892.45 ccw(c6713.66,6922.33) 6755.91,6922.33 ; 6743.53,6892.45 ccw(c6713.66,6922.33) 6755.91,6922.33 ; 6743.53,6892.45 ccw(c6713.66,6922.33) 6755.91,6922.33 ; 6755.91,6922.33 ccw(c6798.15,6922.33) 6768.28,6892.45 ; 6755.91,6922.33 ccw(c6798.15,6922.33) 6768.28,6892.45 ; 6755.91,6922.33 ccw(c6798.15,6922.33) 6768.28,6892.45 ; MC1.11@6779.59,5367.35 cw(c6795.12,5351.12) 6811,5367 ; MC1.11@6779.59,5367.35 cw(c6795.12,5351.12) 6811,5367 ; MC1.11@6779.59,5367.35 cw(c6795.12,5351.12) 6811,5367 ; MC1.11@6779.87,5392.37 ccw(c6841.13,5453.63) 6841.13,5367 ; MC1.11@6779.87,5392.37 ccw(c6841.13,5453.63) 6841.13,5367 ; MC1.11@6779.87,5392.37 ccw(c6841.13,5453.63) 6841.13,5367 ; MC1.11@6781.28,5369.21 cw(c6799,5355.34) 6810.26,5374.83 ; MC1.11@6781.28,5369.21 cw(c6799,5355.34) 6810.26,5374.83 ; MC1.11@6781.28,5369.21 cw(c6799,5355.34) 6810.26,5374.83 ; MC1.11@6783.95,5385.96 ccw(c6811,5395.77) 6811,5367 ; MC1.11@6783.95,5385.96 ccw(c6811,5395.77) 6811,5367 ; MC1.11@6783.95,5385.96 ccw(c6811,5395.77) 6811,5367 ; C68.1@6797.37,6607.63 cw(c6827.25,6577.75) C68.1@6827.25,6620 ; C68.1@6797.37,6607.63 cw(c6827.25,6577.75) C68.1@6827.25,6620 ; C68.1@6797.37,6607.63 cw(c6827.25,6577.75) C68.1@6827.25,6620 ; C68.1@6797.37,6632.37 ccw(c6827.25,6662.25) C68.1@6827.25,6620 ; C68.1@6797.37,6632.37 ccw(c6827.25,6662.25) C68.1@6827.25,6620 ; C68.1@6797.37,6632.37 ccw(c6827.25,6662.25) C68.1@6827.25,6620 ; 7310.25,5580 cw(c7310.25,5537.75) MC1.32@7340.13,5567.63 ; 7310.25,5580 ccw(c7310.25,5622.25) MC1.32@7340.13,5592.37 ; 7310.25,5580 ccw(c7310.25,5622.25) MC1.32@7340.13,5592.37 ; 7310.25,5580 cw(c7310.25,5537.75) MC1.32@7340.13,5567.63 ; 7310.25,5580 ccw(c7310.25,5622.25) MC1.32@7340.13,5592.37 ; 7310.25,5580 cw(c7310.25,5537.75) MC1.32@7340.13,5567.63
pads on no net: "P2 RELAYS.9" "P2 RELAYS.10" "P3 ANALOG.8" P1PANEL.14 P1PANEL.15 P1PANEL.16 P1PANEL.17 P1PANEL.18 P4KB.13 P4KB.17 P4KB.18 P4KB.19 P4KB.20 PSTR1.2 PSTR1.3 PSTR1.4 U3.12 U3.13 U3.14 U9.7
copper on no net: | length 28346.5
  Top Layer w8: 3937.01,3937.01 7874.02,3937.01 7874.02,7086.61 3937.01,7086.61 3937.01,3937.01
  Bottom Layer w8: 3937.01,3937.01 7874.02,3937.01 7874.02,7086.61 3937.01,7086.61 3937.01,3937.01

## Polygon pours and split planes (outlines as drawn)
NetR8_2 on Bottom Layer "Top Layer-No Net 1" (solid, pour order 113): 5015,5030 5015,5175 5020,5180 5035,5165 5070,5165 5070,5025
GND on Bottom Layer "Top Layer-No Net 1" (solid, pour order 108): 46 vertices, not listed, extent 5385,4135 6335,4655
VCC on Bottom Layer "Top Layer-No Net 1" (solid, pour order 103): 36 vertices, not listed, extent 5505,4500 6690,5015
FLDIRIN on Bottom Layer "Top Layer-No Net" (solid, pour order 137): 4155,5930 4278,5930 4331,5983 4436,6088 4436,6091 4436,6096 4433,6099 4418,6099 4321,6002 4319,6000 4155,6000
CONT_S_IN on Bottom Layer "Top Layer-No Net" (solid, pour order 136): 4221,5676 4195,5702 4156,5702 4156,5630 4195,5630 4223,5658
GND on Bottom Layer "Top Layer-No Net" (solid, pour order 89): 28 vertices, not listed, extent 6750,5695 7235,6915
GND on Bottom Layer "Top Layer-No Net" (solid, pour order 94): 7360,5515 7195,5515 7130,5450 6995,5315 6760,5315 6760,5245 7185,5245 7270,5330 7285,5345 7285,5400 7285,5420 7305,5440 7310,5445 7360,5445
VCC on Bottom Layer "Top Layer-No Net" (solid, pour order 95): 45 vertices, not listed, extent 6665,5335 7360,6870
VCC on Bottom Layer "Top Layer-No Net" (solid, pour order 97): 32 vertices, not listed, extent 4070,6630 6790,7035
GND on Bottom Layer "Top Layer-No Net" (solid, pour order 99): 58 vertices, not listed, extent 5850,4695 6760,5310
GND on Bottom Layer "Top Layer-No Net" (solid, pour order 100): 22 vertices, not listed, extent 5850,5180 6770,5515
GND on Bottom Layer "Top Layer-No Net" (solid, pour order 102): 18 vertices, not listed, extent 4100,4100 5670,4460
GND on Bottom Layer "Top Layer-No Net" (solid, pour order 104): 46 vertices, not listed, extent 4310,4385 5455,5235
GND on Bottom Layer "Top Layer-No Net" (solid, pour order 105): 5380,4605 5380,4750 5510,4880 5620,4990 5620,5025 5580,5065 5550,5065 5495,5010 5320,4835 5320,4640
GND on Bottom Layer "Top Layer-No Net" (solid, pour order 106): 5380,4525 5380,4680 5370,4690 5320,4640 5320,4595 5320,4525 5325,4520
GND on Bottom Layer "Top Layer-No Net" (solid, pour order 107): 23 vertices, not listed, extent 4820,4535 5395,4895
GND on Bottom Layer "Top Layer-No Net" (solid, pour order 109): 36 vertices, not listed, extent 4940,4530 5345,4830
GND on Bottom Layer "Top Layer-No Net" (solid, pour order 110): 4800,4645 4810,4645 4830,4665 4870,4625 4870,4595 4800,4595 4795,4590
GND on Bottom Layer "Top Layer-No Net" (solid, pour order 111): 23 vertices, not listed, extent 4570,4625 4920,4910
GND on Bottom Layer "Top Layer-No Net" (solid, pour order 112): 4685,4645 4645,4685 4645,4590 4690,4590 4695,4595
GND on Bottom Layer "Top Layer-No Net" (solid, pour order 114): 35 vertices, not listed, extent 4495,4800 5515,5235
GND on Bottom Layer "Top Layer-No Net" (solid, pour order 115): 4985,5175 4985,5190 5005,5210 5010,5215 5060,5215 5090,5215 5105,5200 5125,5220 5145,5220 5130,5235 4905,5235 4905,5185 4910,5180 4925,5165 4985,5165
VCC on Bottom Layer "Top Layer-No Net" (solid, pour order 116): 5025,5800 5125,5800 5155,5830 5155,6025 5135,6045 5125,6055 5015,6055 4990,6030 4990,5985 4990,5835 5025,5800
GND on Bottom Layer "Top Layer-No Net" (solid, pour order 117): 34 vertices, not listed, extent 4230,5315 5770,6720
GND on Bottom Layer "Top Layer-No Net" (solid, pour order 119): 6800,5245 6820,5245 6850,5215 6850,5060 6890,5020 6895,5015 7075,5015 7255,5015 7280,5040 7285,5045 7285,5345
GND on Bottom Layer "Top Layer-No Net" (solid, pour order 120): 7285,5275 7285,5410 7270,5425 7145,5300 7145,5280 7260,5280 7265,5275
ANALOGIN on Bottom Layer "Top Layer-No Net" (solid, pour order 122): 6765,6245 6550,6245 6510,6285 6440,6355 6440,6710 6510,6710 6510,6385 6560,6335 6565,6330 6670,6330 6675,6330 6690,6315 6765,6315
GND on Bottom Layer "Top Layer-No Net" (solid, pour order 123): 35 vertices, not listed, extent 5895,5820 6675,6625
GND on Bottom Layer "Top Layer-No Net" (solid, pour order 125): 5685.52,6380.85 5691.37,6375 5740,6375 5755,6390 5755,6435 5755,6555 5750,6560 5685,6625 5615,6625 5205,6625 5175,6595 5335,6435 5510,6435 5631.37,6435 5685.52,6380.85
GND on Bottom Layer "Top Layer-No Net" (solid, pour order 126): 7235,6410 7320,6495 7580,6495 7590,6495 7700,6605 7700,6855 7640,6915 7035,6915 7035,6790 6955,6710 7135,6530 7135,6385
R1IN on Bottom Layer "Top Layer-No Net" (solid, pour order 139): 23 vertices, not listed, extent 4015,4465 4250,5300
TIOUT on Bottom Layer "Top Layer-No Net" (solid, pour order 140): 17 vertices, not listed, extent 4150,4725 4365,5200
DG-Y_ on Bottom Layer "Top Layer-No Net" (solid, pour order 165): 5974,6771 5952,6749 5952,6727 5983,6727 5990,6734 6006,6750 6006,6771
EB-R_ on Bottom Layer "Top Layer-No Net" (solid, pour order 166): 6170,6770 6148,6748 6148,6732 6188,6732 6190,6730 6209,6749 6209,6773 6203,6773 6189,6787
EB-Y_ on Bottom Layer "Top Layer-No Net" (solid, pour order 167): 6270,6772 6238,6740 6238,6714 6254,6714 6296,6756 6277,6775 6273,6775
EB-B_ on Bottom Layer "Top Layer-No Net" (solid, pour order 168): 6370,6772 6338,6740 6338,6725 6359,6725 6402,6768
NetC3_2 on Bottom Layer "Top Layer-No Net" (solid, pour order 169): 6686,5055 6693,5062 6720,5062 6720,5070 6734,5084 6730,5080 6696,5080 6696,5079 6677,5060
NetQ1_1 on Top Layer "Top Layer-No Net 1" (solid, pour order 138): 4785,4400 4785,4395 4790,4390 4810,4390 4815,4390 4815,4455 4785,4455
NetQ1_2 on Top Layer "Top Layer-No Net 1" (solid, pour order 135): 4735,4395 4730,4390 4715,4390 4705,4390 4705,4415 4705,4455 4735,4455
VCC on Top Layer "Top Layer-No Net 1" (solid, pour order 132): 5050,4675 5015,4675 4985,4705 4975,4715 4975,4805 4975,4855 5035,4855 5035,4785 5085,4735
TIOUT on Top Layer "Top Layer-No Net 1" (solid, pour order 130): 4285,4710 4320,4675 4515,4675 4515,4860 4385,4860 4290,4765
NetR27_1 on Top Layer "Top Layer-No Net 1" (solid, pour order 127): 4665,4795 4645,4795 4625,4815 4625,4785 4667,4785 4670,4788
NetR27_1 on Top Layer "Top Layer-No Net 1" (solid, pour order 124): 4580,4675 4635,4675 4635,4805 4635,4860 4575,4860 4575,4690 4570,4685
GND on Top Layer "Top Layer-No Net 1" (solid, pour order 121): 50 vertices, not listed, extent 4270,4775 5330,5155
GND on Top Layer "Top Layer-No Net 1" (solid, pour order 118): 5660,4435 5605,4435 5605,4535 5660,4535
VCC on Top Layer "Top Layer-No Net 1" (solid, pour order 101): 6760,5350 6755,5345 6720,5345 6690,5345 6665,5320 6650,5305 6605,5305 6605,5470 6600,5475 6655,5475 6715,5415 6761.32,5415
GND on Top Layer "Top Layer-No Net 1" (solid, pour order 98): 5905,4465 5905,4545 5895,4555 5830,4555 5785,4600 5780,4595 5780,4485
GND on Top Layer "Top Layer-No Net 1" (solid, pour order 96): 5645,4300 5635,4310 5635,4480 5635,4815 5605,4845 5610,4850 5860,4850 5895,4815 5800,4720 5800,4615 5800,4600 5845,4555 5905,4495 5905,4335 5905,4300
GND on Top Layer "Top Layer-No Net 1" (solid, pour order 93): 22 vertices, not listed, extent 5480,4780 6125,5550
GND on Top Layer "Top Layer-No Net 1" (solid, pour order 90): 6145,4230 5955,4230 5940,4245 5910,4275 5815,4275 5670,4275 5645,4300 5645,4350 5660,4365 5740,4365 5905,4365 5950,4320 5970,4300 6115,4300 6145,4300
GND on Top Layer "Top Layer-No Net 1" (solid, pour order 88): 24 vertices, not listed, extent 6115,4230 6440,4880
VCC on Top Layer "Top Layer-No Net 1" (solid, pour order 87): 24 vertices, not listed, extent 6085,4680 6360,5575
VCC on Top Layer "Top Layer-No Net 1" (solid, pour order 86): 23 vertices, not listed, extent 6225,5485 6540,6115
REMOTIN on Top Layer "Top Layer-No Net" (solid, pour order 131): 4154,5802 4202,5802 4220,5820 4230,5820 4230,5816 4238,5808 4238,5768 4212,5742 4201,5731 4154,5731
GND on Top Layer "Top Layer-No Net" (solid, pour order 91): 22 vertices, not listed, extent 7000,5375 7360,5830
GND on Top Layer "Top Layer-No Net" (solid, pour order 92): 7190,5375 7220,5345 7255,5345 7265,5345 7290,5370 7290,5415 7290,5470 7280,5460 7220,5460 7165,5460 7135,5430
GND on Top Layer "Top Layer-No Net" (solid, pour order 128): 24 vertices, not listed, extent 6590,6585 7025,6875
VCC on Top Layer "Top Layer-No Net" (solid, pour order 129): 24 vertices, not listed, extent 6750,6580 7070,6695
GND on Top Layer "Top Layer-No Net" (solid, pour order 133): 86 vertices, not listed, extent 5125,5365 6305,6115
GND on Top Layer "Top Layer-No Net" (solid, pour order 134): 6345,4960 6365,4980 6425,4980 6460,4980 6460,5120 6375,5120 6345,5150 6330,5135 6330,4960
VCC on Top Layer "Top Layer-No Net" (solid, pour order 141): 29 vertices, not listed, extent 4750,4220 5550,4845
GND on Top Layer "Top Layer-No Net" (solid, pour order 142): 18 vertices, not listed, extent 5245,4575 5360,4845
GND on Top Layer "Top Layer-No Net" (solid, pour order 143): 4350,5135 4350,5380 4310,5420 4290,5440 4255,5440 4235,5420 4235,5375 4235,5170 4295,5110 4325,5080 4350,5080
NetR8_2 on Top Layer "Top Layer-No Net" (solid, pour order 144): 18 vertices, not listed, extent 4910,5130 5100,5285
BTSBATT on Top Layer "Top Layer-No Net" (solid, pour order 145): 4715,4985 4825,4985 4830,4980 4840,4970 4840,4925 4775,4860 4760,4860 4745,4860 4685,4920 4685,4985
NetR8_2 on Top Layer "Top Layer-No Net" (solid, pour order 146): 4935,4925 5000,4925 5065,4990 5075,5000 5075,5030 5070,5035 5015,5035 4965,4985 4945,4965 4935,4965
FLG on Top Layer "Top Layer-No Net" (solid, pour order 147): 5385,5110 5385,4990 5435,4990 5515,5070 5635,5070 5635,5130 5395,5130 5385,5120
FLDIR on Top Layer "Top Layer-No Net" (solid, pour order 148): 4785,5660 4785,5770 4795,5780 4865,5710 4920,5710 5040,5710 5040,5655 5025,5655 4995,5685 4990,5690 4880,5690 4868.98,5690 4813.98,5635 4785,5635
CONT_SENSE on Top Layer "Top Layer-No Net" (solid, pour order 149): 4660,5950 4660,5835 4665,5830 4670,5825 4715,5825 4760,5870 4760,5920 4705,5975 4695,5975 4670,5975 4660,5965
REMOT on Top Layer "Top Layer-No Net" (solid, pour order 150): 4660,6120 4660,6230 4695,6230 4710,6245 4710,6225 4750,6185 4750,6135 4705,6090 4705,6085 4660,6085
LLOP on Top Layer "Top Layer-No Net" (solid, pour order 151): 4710,6355 4715,6355 4755,6395 4755,6425 4755,6435 4750,6440 4705,6485 4705,6490 4680,6490 4660,6470 4660,6380 4660,6360 4665,6355 4660,6355
GND on Top Layer "Top Layer-No Net" (solid, pour order 152): 4614,6511 4614,6529 4617,6532 4630,6532 4636,6526 4636,6510
GND on Top Layer "Top Layer-No Net" (solid, pour order 153): 35 vertices, not listed, extent 4125,4065 4790,4645
GND on Top Layer "Top Layer-No Net" (solid, pour order 154): 25 vertices, not listed, extent 6365,4680 6705,5240
GND on Top Layer "Top Layer-No Net" (solid, pour order 155): 31 vertices, not listed, extent 6320,5095 6765,5450
GND on Top Layer "Top Layer-No Net" (solid, pour order 156): 20 vertices, not listed, extent 6865,5460 7305,6485
GND on Top Layer "Top Layer-No Net" (solid, pour order 157): 38 vertices, not listed, extent 6820,6390 7700,7015
NetD1_2 on Top Layer "Top Layer-No Net" (solid, pour order 158): 6340,5580 6415,5580 6450,5545 6525,5545 6525,5600 6530,5605 6490,5645 6405,5645 6340,5645
NetR21_1 on Top Layer "Top Layer-No Net" (solid, pour order 159): 18 vertices, not listed, extent 5320,5315 5480,5685
GND on Top Layer "Top Layer-No Net" (solid, pour order 160): 33 vertices, not listed, extent 4745,5735 5195,6155
VCC on Top Layer "Top Layer-No Net" (solid, pour order 161): 4880,6690 4880,6695 4850,6725 4830,6745 4830,6845 4830,6870 4845,6870 4890,6825 4900,6815 4900,6690 4890,6690
GND on Top Layer "Top Layer-No Net" (solid, pour order 162): 18 vertices, not listed, extent 5280,4825 5725,5025
GND on Top Layer "Top Layer-No Net" (solid, pour order 163): 4245,4100 4850,4100 4880,4130 4880,4170 4855,4195 4815,4195 4780,4230 4715,4295 4560,4295 4415,4295 4375,4335 4275,4435 4275,4465 4125,4315 4125,4100
VCC on Top Layer "Top Layer-No Net" (solid, pour order 164): 20 vertices, not listed, extent 6415,5310 6765,5510
GND on Top Solder "Top Layer-No Net" (solid): 5602.5,4530 5907.5,4530 5907.5,4430 5602.5,4430

## Keep-outs
Keep-Out Layer:
  lines w8: 3937.01,3937.01 7874.02,3937.01 7874.02,7086.61 3937.01,7086.61 3937.01,3937.01
  lines w10: 7936.47,3948.03 9393.17,3948.03 9393.17,5640.94 7936.47,5640.94 7936.47,3948.03
  text "KEEPOUT LAYER" at 7980.35,5473.52 h70
  text "PCB INFORMATION:" at 7980.35,5271.65 h70
  text "PCB: FR-4" at 7980.35,5069.77 h70
  text "THICKNESS:35MICRONS" at 7980.35,4867.9 h70
  text "LAYERS TO PRINT:" at 7980.35,4666.02 h70
  text "TOP LAYER CU" at 8299.35,4531.02 h60
  text "TOP LEGEND" at 8299.35,4407.27 h60
  text "TOP SOLDER" at 8299.35,4283.52 h60
  text "BOTTOM SOLDER" at 8299.35,4159.77 h60
  text "BOTTOM LAYER CU" at 8299.35,4036.02 h60

## Other copper
Top Layer:
  text "TOP LAYER CU" at 7935.35,6991.02 h70
  text "COMPONENT SIDE" at 5540.23,3999 h60
Bottom Layer:
  text "BOTTOM LAYER CU" at 7935.35,6774.52 h70
  text "SIMCONS   A1 rev3.1" at 7810,6305 h60 r90
  text "SOLDER SIDE" at 6260,3999 h60

## Silkscreen, mask and mechanical layers (free items; w line width, h text height)
Top Overlay:
  the board outline again, w8
  text "S/N:" at 5775,7000 h90 r180
  text "TOP LEGEND" at 7935.35,6558.02 h70
  text "SIMCONS CONTROL SYSTMES" at 7545,4470 h80 r90
  text "A1 rev3.1" at 4715,3995 h80
Top Solder:
  the board outline again, w8
  text "TOP SOLDER" at 7935.35,6341.52 h70
Bottom Solder:
  the board outline again, w8
  text "BOTTOM SOLDER" at 7935.35,6125.02 h70